# Altium PCB Control_Board_Model_C_Rigid_Flex_Flipped.PcbDoc (part 8 of 8)
Units mil, origin at the board's own origin, x right, y up, seen from the top; angles counter-clockwise.
Board outline 3417.32 x 2110.24 mil, 6 copper layers (1-Sig/GND, 2-Sig, 3-GND, 4-Sig/Pwr, 5-Sig, 6-Sig/GND), stack 39.291 mil thick; 418 components, 342 nets, 1601 pads, 44 vias.
Unrouted connection lines stored in the file: 13.
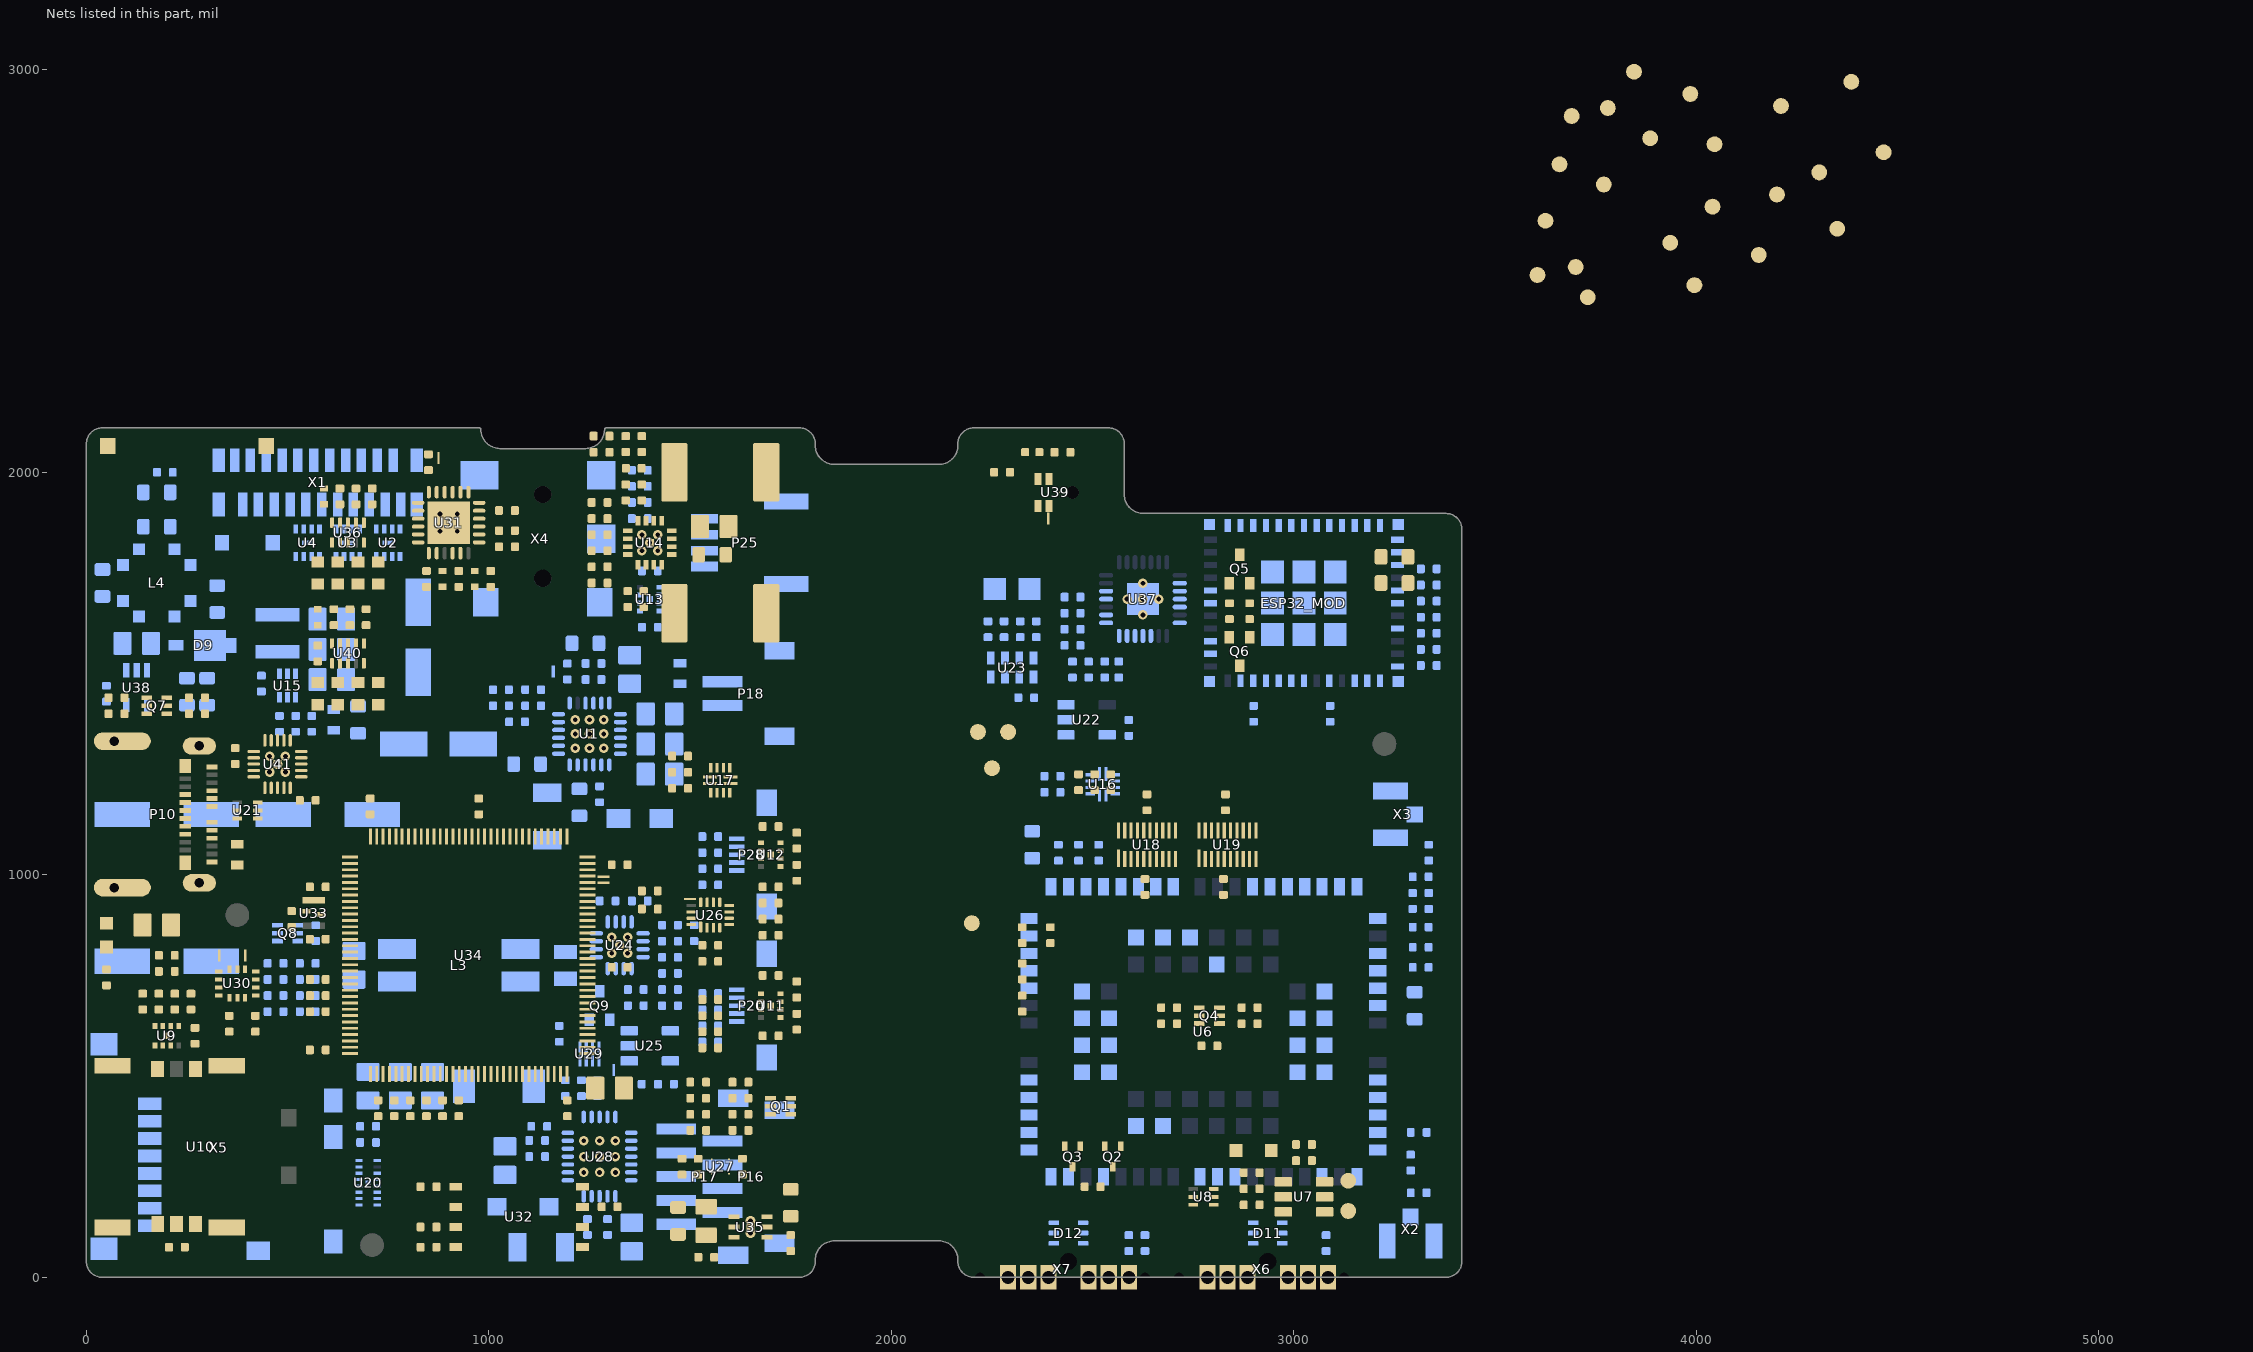
[diagram p8: the nets of this part, all layers, seen from the top]

## Part data (continued)
U28: library part "IC DRV10975Z BLDC MOTOR DRIVER VQFN-24", "Multiphase Motor Driver Power MOSFET Analog, I²C, PWM 24-VQFN (5x4)", Manufacturer="Texas Instruments", Maximum Operating Temperature="+ 125 C", Minimum Operating Temperature="- 40 C", Operating Frequency="100 kHz", Operating Supply Current="5 mA", Operating Supply Voltage="6.5 V to 18 V", Operating Temperature Range="- 40 C to + 125 C", Output Current="1.5 A", Output Voltage="19 V", Package / Case=VQFN-24, Supplier Part Number 1=296-50214-1-ND, Brand="Texas Instruments", Category="Motor / Motion / Ignition Controllers & Drivers", Development Kit=DRV10975EVM, Features="Buck Step Down Converter, Initial Position Detect (IPD), Rotor Lock Protection, SPI/I2C, Integrated", Manufacturer Part Number=DRV10975ZRHFR, Minimum Order Quantity=1, Moisture Sensitive=Yes, Mount="Surface Mount", Number of Outputs="3 Output", Packaging="Cut Tape", Pricing 1="1=2.73, 10=2.31, 100=1.85, 250=1.62, 500=1.58, 1000=1.25, 3000=1.21, 6000=1.16, 9000=1.14 (USD)", Product="Brushless DC Motor Controllers", Product Type="Motor / Motion / Ignition Controllers & Drivers", Reeling=True, RoHS="RoHS Compliant", RoHS - Mouser=Y, Series=DRV10975, Standard Pack Qty=3000, Stock 1=2979, Subcategory="PMIC - Power Management ICs", Supplier 1=Digi-Key, Type="Half Bridge"
U29: library part "IC TXS0102 TRNSLTR BIDIRECTIONAL 8X2SON", "2-Bit Bidirectional Voltage-Level Translator for Open-Drain Application", High Level Output Current=-20uA, Low Level Output Current=1mA, Manufacturer="Texas Instruments", Max Operating Temperature=85°C, Max Supply Voltage=5.5V, Min Operating Temperature=-40°C, Min Supply Voltage=1.65V, Package Quantity=1, Quiescent Current=14.4uA, Supplier Part Number 1=296-28435-1-ND, ComponentLink1Description=https://www.verical.com/server-webapp/html/getDatasheet?partID=544149&src-supplier=Verical, ComponentLink1URL=https://www.verical.com/server-webapp/html/getDatasheet?partID=544149&src-supplier=Verical, ComponentLink2Description=http://www.ti.com/general/docs/suppproductinfo.tsp?distId=10&gotoUrl=http%3A%2F%2Fwww.ti.com%2Flit%2Fgpn%2Ftxs0102&src-supplier=Digi-Key, ComponentLink2URL=http://www.ti.com/general/docs/suppproductinfo.tsp?distId=10&gotoUrl=http%3A%2F%2Fwww.ti.com%2Flit%2Fgpn%2Ftxs0102&src-supplier=Digi-Key, Contact Plating=Gold, Data Rate=24Mbps, Height=0.35mm, Lead Free="Lead Free", Length=1.85mm, Logic Function=Translator, Manufacturer Part Number=TXS0102DQMR, Mount="Surface Mount", Number of Bits=2, Number of Channels=2, Number of Inputs=2, Number of Pins=8, Output Type=Voltage, Packaging="Tape and Reel", Pricing 1="1=0.69, 10=0.611, 25=0.5736, 100=0.4681, 250=0.4348, 500=0.37, 1000=0.296 (USD)", Propagation Delay=260ns, Radiation Hardening=No, REACH SVHC="No SVHC", Stock 1=53273, Supplier 1=Digi-Key, Turn-On Delay Time=4.6ns, Width=1.25mm
U30: library part "IC BMI270 IMU ACCEL/GYRO I2C/SPI 14LGA", "Accelerometer, Gyroscope, 6 Axis Sensor I²C, SPI Output", Manufacturer="Bosch Sensortec", Supplier Part Number 1=828-1091-1-ND, Manufacturer Part Number=BMI270, Pricing 1="1=5.75, 5=5.07, 10=4.478, 25=3.6336, 50=3.211, 100=3.1265, 500=2.6195, 1000=2.4505 (USD)", Stock 1=0, Supplier 1=Digi-Key
U31: library part "IC CMX655DQ6-TR1K VOICE CODEC 16BIT 24VQFN", "Voice-Band Interface 16 b I²S, PCM, SPI 24-VQFN (4x4)", Case/Package=VQFN, Manufacturer="CML Microcircuits", Supplier Part Number 1=226-CMX655DQ6, ComponentLink1Description=https://www.cmlmicro.com/wp-content/uploads/2018/10/CMX655_ds.pdf?src-supplier=Digi-Key, ComponentLink1URL=https://www.cmlmicro.com/wp-content/uploads/2018/10/CMX655_ds.pdf?src-supplier=Digi-Key, Manufacturer Part Number=CMX655DQ6, Mount="Surface Mount", Packaging="Cut Tape", Pricing 1="1=1.41, 10=1.41, 50=1.36, 100=1.22, 1000=1.07, 10000=1.01 (USD)", Stock 1=164, Supplier 1=Mouser, Supplier 2=Digi-Key, Supplier Part Number 2=2032-1036-1-ND
U32: library part "IC MT29F1G01ABAFDWB FLASH 1GBIT SPI 8UPDFN", "FLASH - NAND Memory IC 1Gb (1G x 1) SPI   8-U-PDFN (8x6)", Manufacturer="Micron Technology", Max Operating Temperature=85°C, Min Operating Temperature=-40°C, Supplier Part Number 1=557-1654-1-ND, Interface=SPI,Serial, Manufacturer Part Number="MT29F1G01ABAFDWB-IT:F TR", Memory Type=FLASH,NAND, Number of Pins=8, Packaging="Tape and Reel", Pricing 1="1=2.68, 10=2.414, 25=2.3768, 50=2.3704, 100=2.1181, 250=2.0485, 500=2.041, 1000=1.9006 (USD)", Stock 1=2188, Supplier 1=Digi-Key
U33: "32.768kHz XO (Standard) LVCMOS Oscillator 1.5V ~ 3.63V  4-SMD, No Lead", Case/Package=SMD/SMT, Current Rating=1.35uA, Frequency=32.768kHz, Frequency Stability=100ppm, Load Capacitance=10pF, Manufacturer=SiTime, Manufacturer Part Number=SIT1533AI-H4-DCC-32.768E, Max Operating Temperature=85°C, Max Supply Current=1.4uA, Max Supply Voltage=3.63V, Min Operating Temperature=-40°C, Min Supply Voltage=1.5V, Package Quantity=1000, Supplier Part Number 1=1473-1239-1-ND, ClassName=MCU, ComponentLink1Description=https://www.sitime.com/datasheet/SiT1533?src-supplier=Digi-Key, ComponentLink1URL=https://www.sitime.com/datasheet/SiT1533?src-supplier=Digi-Key, ComponentLink2Description=http://www.mouser.com/ds/2/371/SiT1533-datasheet-275337.pdf?src-supplier=Mouser, ComponentLink2URL=http://www.mouser.com/ds/2/371/SiT1533-datasheet-275337.pdf?src-supplier=Mouser, ComponentLink3Description=http://components.arrow.com/part/dataview/0323_07137603?src-supplier=Arrow+Europe, ComponentLink3URL=http://components.arrow.com/part/dataview/0323_07137603?src-supplier=Arrow+Europe, Height=0.024inch, Length=0.079inch, Max Duty Cycle=52%, Mount="Surface Mount", Number of Pins=4, Packaging="Tape and Reel", Pricing 1="1=1.1, 10=0.975, 50=0.9116, 100=0.8056, 500=0.7632 (USD)", RoHS Compliant=Yes, Stock 1=89278, Supplier 1=Digi-Key, Termination=SMD/SMT, Width=0.047inch
U34: library part "IC STM32G473QETx MCU 32BIT 512KB FLASH 128LQFP", "ARM® Cortex®-M4 STM32G4 Microcontroller IC 32-Bit 170MHz 512KB (512K x 8) FLASH 128-LQFP (14x14)", Manufacturer=STMicroelectronics, Supplier Part Number 1=497-STM32G473QET6-ND, Manufacturer Part Number=STM32G473QET6, Pricing 1="540=7.5029 (USD)", Stock 1=0, Supplier 1=Digi-Key
U35: library part "IC TPS22810DRVT PWR SWITCH N-CHAN 1:1 6WSON", "TPS22810, 2.7-18-V, 79-mOhm On-Resistance Load Switch With Thermal Protection", Manufacturer="Texas Instruments", Max Operating Temperature=105°C, Max Output Current=3A, Min Operating Temperature=-40°C, Supplier Part Number 1=296-46947-1-ND, ComponentLink1Description=http://www.ti.com/lit/ds/symlink/tps22810.pdf?src-supplier=Digi-Key, ComponentLink1URL=http://www.ti.com/lit/ds/symlink/tps22810.pdf?src-supplier=Digi-Key, ComponentLink2Description=http://www.ti.com/general/docs/lit/getliterature.tsp?genericPartNumber=TPS22810&fileType=pdf&src-supplier=Farnell, ComponentLink2URL=http://www.ti.com/general/docs/lit/getliterature.tsp?genericPartNumber=TPS22810&fileType=pdf&src-supplier=Farnell, Fault Protection="Over Temperature", Interface=On/Off, Manufacturer Part Number=TPS22810DRVT, Mount="Surface Mount", Number of Channels=1, Number of Outputs=1, Output Configuration="High Side", Packaging="Tape and Reel", Pricing 1="1=0.66, 10=0.581, 25=0.5456, 100=0.4136 (USD)", Stock 1=5029, Supplier 1=Digi-Key
U36 U40: library part "IC TPSM82822SIL 5.5-V INPUT, 2-A STEP-DOWN MODUL", "Non-Isolated PoL Module DC DC Converter 1 Output 0.6 ~ 4V    2A 2.4V - 5.5V Input", Manufacturer="Texas Instruments", Supplier Part Number 1=296-TPSM82822SILRCT-ND, ComponentLink1Description=https://octopart.com/click/track?ai=10049&ct=datasheets&sig=01db677&at=physicalpart&sid=370&ppid=108054084&hlid=30259078&src-supplier=TI+store, ComponentLink1URL=https://octopart.com/click/track?ai=10049&ct=datasheets&sig=01db677&at=physicalpart&sid=370&ppid=108054084&hlid=30259078&src-supplier=TI+store, Manufacturer Part Number=TPSM82822SILR, Pricing 1="1=2.81, 10=2.523, 25=2.3848, 100=1.961, 250=1.7596, 500=1.696, 1000=1.4098 (USD)", Stock 1=2595, Supplier 1=Digi-Key
U37: library part "IC CP2102N USB TO UART BRIDGE QFN28", "USB Bridge, USB to UART USB 2.0 UART Interface 28-QFN (5x5)", Manufacturer="Silicon Labs", Supplier Part Number 1=336-5890-1-ND, ComponentLink1Description=https://4donline.ihs.com/images/VipMasterIC/IC/SILC/SILC-S-A0007770867/SILC-S-A0007770867-1.pdf?hkey=6D3A4C79FDBF58556ACFDE234799DDF0&src-supplier=Farnell, ComponentLink1URL=https://4donline.ihs.com/images/VipMasterIC/IC/SILC/SILC-S-A0007770867/SILC-S-A0007770867-1.pdf?hkey=6D3A4C79FDBF58556ACFDE234799DDF0&src-supplier=Farnell, Manufacturer Part Number=CP2102N-A02-GQFN28R, Mount="Surface Mount", Pricing 1="1=1.4, 25=1.3516, 100=1.2995 (USD)", Stock 1=3461, Supplier 1=Digi-Key
U38: library part "IC TPS61169 WLED BACKLIGHT DRIVER SC70-5", "LED Driver IC 1 Output DC DC Regulator Step-Up (Boost) PWM Dimming 1.8A (Switch) SC-70-5", Case/Package=SC, Frequency=1.2MHz, Manufacturer="Texas Instruments", Max Input Voltage=5.5V, Max Operating Temperature=85°C, Max Output Current=2.4A, Max Output Voltage=38V, Min Input Voltage=2.7V, Min Operating Temperature=-40°C, Nominal Input Voltage (DC)=3.6V, Output Current=400mA, Output Current per Channel=1.8A, Package Quantity=3000, Supplier Part Number 1=296-40821-1-ND, ComponentLink1Description=http://www.ti.com/general/docs/lit/getliterature.tsp?genericPartNumber=TPS61169&&fileType=pdf&src-supplier=Element14, ComponentLink1URL=http://www.ti.com/general/docs/lit/getliterature.tsp?genericPartNumber=TPS61169&&fileType=pdf&src-supplier=Element14, ComponentLink2Description=http://www.ti.com/general/docs/lit/getliterature.tsp?genericPartNumber=TPS61169&amp;&amp;fileType=pdf&src-supplier=Farnell, ComponentLink2URL=http://www.ti.com/general/docs/lit/getliterature.tsp?genericPartNumber=TPS61169&amp;&amp;fileType=pdf&src-supplier=Farnell, ComponentLink3Description=http://www.ti.com/lit/ds/symlink/tps61169.pdf?src-supplier=Digi-Key, ComponentLink3URL=http://www.ti.com/lit/ds/symlink/tps61169.pdf?src-supplier=Digi-Key, ComponentLink4Description=http://www.ti.com/general/docs/lit/getliterature.tsp?genericPartNumber=TPS61169&&fileType=pdf&src-supplier=Avnet, ComponentLink4URL=http://www.ti.com/general/docs/lit/getliterature.tsp?genericPartNumber=TPS61169&&fileType=pdf&src-supplier=Avnet, ComponentLink5Description=http://www.ti.com/lit/gpn/tps61169?src-supplier=Mouser, ComponentLink5URL=http://www.ti.com/lit/gpn/tps61169?src-supplier=Mouser, Contact Plating=Gold, Dimming=PWM, Height=1.1mm, Lead Free="Lead Free", Length=2mm, Manufacturer Part Number=TPS61169DCKR, Max Input Voltage (DC)=5.5V, Max Supply Voltage=5.5V, Min Output Voltage=2.7V, Mount="Surface Mount", Number of Channels=1, Number of Outputs=1, Number of Pins=5, Output Type=Frequency, Output Voltage=38V, Packaging="Tape and Reel", Pricing 1="1=0.9, 10=0.805, 25=0.7644, 100=0.587, 250=0.5187, 500=0.4914, 1000=0.3822 (USD)", REACH SVHC="No SVHC", Stock 1=112915, Supplier 1=Digi-Key, Switching Frequency=1.2MHz, Topology=Boost, Weight=0.000705oz, Width=1.25mm
U39: library part "IC IM69D130 MICROPHONE MEMS DIGITAL PDM OMNI", "20Hz ~ 20kHz Digital, PDM Microphone MEMS (Silicon) 1.62V ~ 3.6V Omnidirectional (-36dB ±1dB @ 94dB SPL) Solder Pads", Manufacturer=Infineon, Max Frequency=3.3MHz, Operating Supply Current=1.3mA, Operating Supply Voltage=-3.6V, Supplier Part Number 1=IM69D130V01XTSA1CT-ND, ComponentLink1Description=http://www.farnell.com/datasheets/2718732.pdf?src-supplier=Newark, ComponentLink1URL=http://www.farnell.com/datasheets/2718732.pdf?src-supplier=Newark, ComponentLink2Description=https://www.infineon.com/dgdl/Infineon-IM69D130-DS-v01_00-EN.pdf?fileId=5546d462602a9dc801607a0e46511a2e&src-supplier=Digi-Key, ComponentLink2URL=https://www.infineon.com/dgdl/Infineon-IM69D130-DS-v01_00-EN.pdf?fileId=5546d462602a9dc801607a0e46511a2e&src-supplier=Digi-Key, ComponentLink3Description=http://www.farnell.com/datasheets/2718732.pdf?src-supplier=Farnell, ComponentLink3URL=http://www.farnell.com/datasheets/2718732.pdf?src-supplier=Farnell, Direction=Omnidirectional, Halogen Free="Halogen Free", Lead Free="Lead Free", Manufacturer Part Number=IM69D130V01XTSA1, Output Type=Digital, Packaging="Cut Tape", Pricing 1="1=1.76, 10=1.458, 25=1.3476, 50=1.2674, 100=1.19, 500=1.0214 (USD)", RoHS Compliant=Yes, Shape=Rectangular, Stock 1=16861, Supplier 1=Digi-Key, Termination=Solder
U41: library part "IC TPD6S300A USB-C ESD PROTECTION", "USB Type-C™ Port Protector: Short-to-VBUS Overvoltage  and IEC ESD Protection", Manufacturer="Texas Instruments", Maximum Operating Temperature="+ 85 C", Minimum Operating Temperature="- 40 C", Operating Supply Current="600 mA", Operating Supply Voltage="3.3 V", Package / Case=WQFN-20, Supplier Part Number 1=595-TPD6S300ARUKR, Supply Voltage - Max="3.6 V", Supply Voltage - Min="2.7 V", Brand="Texas Instruments", Category="USB Interface IC", Data Rate=-, ESD Protection="ESD Protection", Interface Type=USB, Manufacturer Part Number=TPD6S300ARUKR, Minimum Order Quantity=1, Moisture Sensitive=Yes, Mount="Surface Mount", Mounting Style=SMD/SMT, Packaging="Cut Tape", Pricing 1="1=1.31, 10=1.11, 100=0.852, 500=0.753, 1000=0.594, 3000=0.555, 6000=0.527, 9000=0.507 (USD)", Product="USB Protectors", Product Type="USB Interface IC", Reeling=True, RoHS="RoHS Compliant", RoHS - Mouser=Y, Series=TPD6S300A, Speed="Super Speed", Standard="USB-C 2.0", Standard Pack Qty=3000, Stock 1=6078, Subcategory="Interface ICs", Supplier 1=Mouser, Supplier 2=Digi-Key, Supplier Part Number 2=296-51856-1-ND
X1: library part "CONN 0525592253 FFC VERT 22POS 0.50MM SMD", "22 Position FFC, FPC Connector Contacts, Vertical - 1 Sided 0.020\" (0.50mm) Surface Mount", Current Rating=500mA, Manufacturer=Molex, Manufacturer Part Number=52559-2253, Package Quantity=1000, Supplier Part Number 1=WM10988CT-ND, Voltage Rating=50V, ComponentLink1Description=http://www.farnell.com/datasheets/1896633.pdf?src-supplier=Element14, ComponentLink1URL=http://www.farnell.com/datasheets/1896633.pdf?src-supplier=Element14, ComponentLink2Description=http://www.mouser.com/ds/2/276/0525592253_FFC_FPC_CONNECTORS-229826.pdf?src-supplier=Mouser, ComponentLink2URL=http://www.mouser.com/ds/2/276/0525592253_FFC_FPC_CONNECTORS-229826.pdf?src-supplier=Mouser, Contact Material=Bronze, Contact Plating=Gold, Gender=Receptacle, Housing Material=Nylon, Mount="Surface Mount", Number of Circuits=22, Number of Contacts=22, Number of Positions=22, Number of Rows=1, Orientation=Vertical, Packaging="Tape and Reel", pin_1=ROW_1, pin_2=ROW_2, pin_3=ROW_3, pin_4=COL_1, pin_5=COL_2, pin_6=COL_3, pin_7=PWR, pin_8=GND, pin_9=RESET, pin_10=GND, pin_11=SDA, pin_12=GND, pin_13=RS, pin_14=GND, pin_15=WR, pin_16=GND, pin_17=CS, pin_18=GND, pin_19=LED_K, pin_20=GND, pin_21=LED_A, pin_22=VDD, pin_23=MNT, pin_24=MNT, Pitch=0.5mm, Pricing 1="1=2.66, 10=2.267, 100=1.8728 (USD)", REACH SVHC=Unknown, Series=52559, Stock 1=4369, Supplier 1=Digi-Key, Termination=SMD/SMT
X2 X3: library part "CONN U.FL RCPT STR 50 OHM SMD", "U.FL (UMCC) Connector Receptacle, Male Pin 50Ohm Surface Mount Solder", Dielectric Material=Polymer, Frequency=6GHz, Housing Color=Beige, Insulation Resistance=500MR, Manufacturer=Hirose, Max Operating Temperature=90°C, Min Operating Temperature=-40°C, Package Quantity=2500, Supplier Part Number 1=H11891CT-ND, Body Material=Bronze, Body Plating=Silver, ClassName=P109, ComponentLink1Description=http://www.farnell.com/datasheets/91524.pdf?src-supplier=Element14, ComponentLink1URL=http://www.farnell.com/datasheets/91524.pdf?src-supplier=Element14, ComponentLink2Description=http://uk.rs-online.com/webdocs/1363/0900766b81363563.pdf?src-supplier=RSComponents, ComponentLink2URL=http://uk.rs-online.com/webdocs/1363/0900766b81363563.pdf?src-supplier=RSComponents, ComponentLink3Description=http://www.farnell.com/datasheets/2691132.pdf?src-supplier=Element14, ComponentLink3URL=http://www.farnell.com/datasheets/2691132.pdf?src-supplier=Element14, Connector Type="Coaxial,Receptacle,Male Pin", Contact Material=Brass,Bronze, Contact Plating=Gold, Depth=3.1mm, Fastening Type=Snap, Gender=Male, Impedance=50R, Lead Free="Lead Free", Length=3mm, Manufacturer Part Number=U.FL-R-SMT-1(10), Max Frequency=6GHz, Mount="Surface Mount", Orientation=Straight, Packaging="Tape and Reel", Pricing 1="1=1.31, 10=1.15, 25=1.0824, 50=1.0374, 100=0.9922, 250=0.902, 500=0.8118, 1000=0.7216 (USD)", Radiation Hardening=No, REACH SVHC="No SVHC", Stock 1=19543, Supplier 1=Digi-Key, Termination=Solder, Wire/Cable Type=Coaxial
X4: library part "AUDIO JACK SJ2-25515A 2.5 MM RT 5 CONDUC", "2.50mm (0.094\", 3/32\", Sub Mini, Miniature) - Headphone Phone Jack 5 Conductor (TRRRS) Connector Solder", Color=Black, Current Rating=1A, Manufacturer=CUI, Manufacturer Part Number=SJ2-25515A-SMT-TR, Max Operating Temperature=85°C, Min Operating Temperature=-25°C, Supplier Part Number 1=CP-SJ2-25515A-SMT-CT-ND, ComponentLink1Description=https://www.cui.com/product/resource/digikeypdf/sj2-2551x-smt.pdf?src-supplier=Digi-Key, ComponentLink1URL=https://www.cui.com/product/resource/digikeypdf/sj2-2551x-smt.pdf?src-supplier=Digi-Key, Connector Type=Jack, Contact Material=Brass, Contact Plating=Gold,Silver, Gender=Female, Housing Material=Nylon, Mount="Surface Mount", Number of Conductors=5, Number of Ports=1, Orientation=Horizontal, Packaging="Cut Tape", pin_1=GND, pin_2=SCL, pin_3=SDA, pin_4=VDD, pin_5=GPIO, Pricing 1="1=1.35, 10=1.227, 25=1.1524, 50=1.1022, 100=1.0521, 250=0.9519, 500=0.8768 (USD)", Shielding=Unshielded, Stock 1=946, Supplier 1=Digi-Key, Termination=Solder
X5: library part "CONN MICRO SD CARD PUSH-PUSH R/A", "10 (8 + 2) Position Card Connector Secure Digital - microSD™ Surface Mount, Right Angle Gold", Current Rating=500mA, Manufacturer=Molex, Manufacturer Part Number=5025700893, Max Operating Temperature=85°C, Max Voltage Rating (DC)=1.01kV, Min Operating Temperature=-25°C, Package Quantity=1, Supplier Part Number 1=WM19093CT-ND, Voltage Rating (AC)=10V, ComponentLink1Description=https://www.molex.com/pdm_docs/sd/5025700893_sd.pdf?src-supplier=Digi-Key, ComponentLink1URL=https://www.molex.com/pdm_docs/sd/5025700893_sd.pdf?src-supplier=Digi-Key, ComponentLink2Description=http://www.mouser.com/ds/2/276/5025700893_MEMORY_CARD_SOCKET-179363.pdf?src-supplier=Mouser, ComponentLink2URL=http://www.mouser.com/ds/2/276/5025700893_MEMORY_CARD_SOCKET-179363.pdf?src-supplier=Mouser, ComponentLink3Description=http://www.molex.com/webdocs/datasheets/pdf/en-us/5025700893_MEMORY_CARD_SOCKET.pdf?src-supplier=Avnet+Europe, ComponentLink3URL=http://www.molex.com/webdocs/datasheets/pdf/en-us/5025700893_MEMORY_CARD_SOCKET.pdf?src-supplier=Avnet+Europe, ComponentLink4Description=http://www.farnell.com/datasheets/1630840.pdf?src-supplier=Element14, ComponentLink4URL=http://www.farnell.com/datasheets/1630840.pdf?src-supplier=Element14, ComponentLink5Description=http://uk.rs-online.com/webdocs/13c5/0900766b813c54fb.pdf?src-supplier=RSComponents, ComponentLink5URL=http://uk.rs-online.com/webdocs/13c5/0900766b813c54fb.pdf?src-supplier=RSComponents, ComponentLink6Description=https://www.verical.com/server-webapp/html/getDatasheet?partID=321553&src-supplier=Verical, ComponentLink6URL=https://www.verical.com/server-webapp/html/getDatasheet?partID=321553&src-supplier=Verical, ComponentLink7Description=http://www.molex.com/webdocs/datasheets/pdf/en-us/5025700893_MEMORY_CARD_SOCKET.pdf?src-supplier=Avnet+Asia, ComponentLink7URL=http://www.molex.com/webdocs/datasheets/pdf/en-us/5025700893_MEMORY_CARD_SOCKET.pdf?src-supplier=Avnet+Asia, ComponentLink8Description=http://www.molex.com/webdocs/datasheets/pdf/en-us/5025700893_MEMORY_CARD_SOCKET.pdf?src-supplier=Avnet, ComponentLink8URL=http://www.molex.com/webdocs/datasheets/pdf/en-us/5025700893_MEMORY_CARD_SOCKET.pdf?src-supplier=Avnet, ComponentLink9Description=http://www.molex.com/webdocs/datasheets/pdf/en-us/5025700893_MEMORY_CARD_SOCKET.pdf?src-supplier=Element14, ComponentLink9URL=http://www.molex.com/webdocs/datasheets/pdf/en-us/5025700893_MEMORY_CARD_SOCKET.pdf?src-supplier=Element14, Connector Type=Connector, Contact Material="Copper Alloy,Copper", Contact Plating=Gold, Depth=15.5mm, Gender=Female, Halogen Free="Low Halogen", Height=1.8mm, Housing Material=Polymer, Lead Free="Lead Free", Length=13.8mm, Mount="Surface Mount", Number of Circuits=8, Number of Contacts=8, Number of Rows=1, Orientation="Right Angle", Packaging="Tape and Reel", pin_0=SHELL, pin_1=DAT2, pin_2=CD/DAT3, pin_3=CMD, pin_4=Vdd, pin_5=CLK, pin_6=Vss, pin_7=DAT0, pin_8=DAT1, pin_9=DET_LVR, pin_10=DET_SW, Pitch=1.1mm, Pricing 1="1=3.97, 10=3.812, 25=3.4944, 50=3.3356, 100=3.1768, 250=2.7797, 500=2.7003 (USD)", Radiation Hardening=No, REACH SVHC=Unknown, Stock 1=10664, Supplier 1=Digi-Key, Termination=SMD/SMT, Width=1.8mm
X6 X7: library part "EC06-IDC 6-pin Castellated Board-Edge Connector", "6-pin Edge-Connect™ connector to 6-pin 0.1\" pitch female IDC.", pin_1=1, pin_2=2, pin_3=3, pin_4=4, pin_5=5, pin_6=6
Y1: library part "SPEAKER CMS-151135-078S 15 X 11 MM ENCLOSED", "8 Ohms General Purpose Speaker 700mW 100Hz ~ 20kHz Top Rectangular", Manufacturer=CUI, Max Power Dissipation=1W, Power Rating=700mW, Self Resonant Frequency=550Hz, Supplier Part Number 1=102-4616-ND, ComponentLink1Description=https://www.cui.com/product/resource/digikeypdf/CMS-15113-078x.pdf?src-supplier=Digi-Key, ComponentLink1URL=https://www.cui.com/product/resource/digikeypdf/CMS-15113-078x.pdf?src-supplier=Digi-Key, Impedance=8R, Manufacturer Part Number=CMS-151135-078S, Packaging=Tray, Pricing 1="1=2.07, 10=1.72, 25=1.5888, 50=1.4932, 100=1.4013, 500=1.2016, 1000=1.17 (USD)", Sensing Method=Magnetic, Shape=Rectangular, Stock 1=1971, Supplier 1=Digi-Key, Type="General Purpose"
Logo: ClassName=PCB_FEATURE

## Via types
v1: diameter 23.81, hole 11.81, 1-Sig/GND to 6-Sig/GND, tented both sides, 31 vias
v2: diameter 23.82, hole 11.81, 1-Sig/GND to 6-Sig/GND, tented both sides, 9 vias
v3: diameter 23.62, hole 11.81, 1-Sig/GND to 6-Sig/GND, tented both sides, 4 vias

## Nets (pads, with @x,y where several pads share a name; then routed paths per layer and width w, separated by ;. In a path a pad name is that pad's centre, name@x,y a point inside that pad or via, vN(x,y) a via of type N, cw(c..) or ccw(c..) an arc to the next point about the centre after c; other vN are vias at no path point)
+1V8: C33.2 C84.2 Q4.3 Q4.6 R61.2 R62.2 R63.2 TP14.1 U27.1
+1V8_BG95: C17.2 C18.2 C55.2 C57.2 R45.1 U6.29 U18.5 U19.5
+3V3: C12.1 C13.1 C34.1 C35.1 C36.1 C53.2 C54.2 C56.1 C58.1 C59.2 C60.2 C81.1 C82.1 C91.1 C93.2 C94.1 C95.2 C101.2 C102.2 C103.2 C104.2 C105.2 C106.2 C107.1 C108.2 C109.1 C110.2 C111.1 C112.2 C113.1 C114.1 C115.1 C121.1 C130.2 C131.2 C132.2 C133.2 C142.2 C143.1 C144.1 C145.2 C146.2 C147.2 ESP32_MOD.3 FB5.2 FB7.1 J1.1 NT4.1 NT7.2 Q1.2 Q1.5 R9.2 R10.2 R11.1 R12.1 R13.1 R14.1 R15.1 R16.1 R17.1 R18.1 R24.1 R25.1 R54.1 R55.1 R56.1 R67.2 R82.1 R85.1 R115.2 R116.2 R118.1 R119.1 R120.1 R121.1 R130.1 R134.2 TP15.1 U11.5 U12.5 U13.5 U16.12 U17.12 U18.16 U19.16 U20.15 U20.16 U26.1 U29.1 U30.5 U30.8 U31.7 U31.8 U32.8 U33.4 U34.6 U34.13 U34.31 U34.47 U34.64 U34.79 U34.95 U34.111 U34.128 U35.6 U37.6 U37.7 U40.5 U40.6 U40.7 U41.10 X1.22 X5.4 X6.1 X7.1
+3V3_AUX: C37.2 C38.2 C39.2 C67.2 C69.2 C83.2 C123.1 P20.3 P28.3 R5.2 R6.2 R7.2 R8.2 R19.1 R20.1 R21.1 R97.1 R112.2 R124.2 TP13.1 U22.5 U23.7 U27.4 U35.1 X4.4
\BG95_PWRKEY: C32.2 Q2.3 U6.15
\BG95_RESET: Q3.3 U6.17
\CP2102_RST: R130.2 U37.9
\ESP32_RST: C100.2 ESP32_MOD.8 R117.1 R118.2
\INT: R97.2 U23.2
\RST: Q5.3 R51.2 R117.2
\STM32_RST: D11.6 R18.2 R122.1 X6.3
\SUSP_B: U37.11
\UI_BAT_EN: D3.1 U1.12 U3.7
A1_0: U6.19 U19.1
A1_1: U6.20 U19.2
A1_2: U6.21 U19.3
A1_3: U6.18 U19.4
A1_4: U6.30 U19.7
A1_5: U6.39 U19.8
A1_6: U6.38 U19.9
A1_7: U6.1 U19.10
A2_0: U6.35 U18.1
A2_1: U6.34 U18.2
A2_2: U6.27 U18.3
A2_3: U6.28 U18.4
A2_4: U6.23 U18.7
A2_5: U6.22 U18.8
A2_6: U6.36 U18.9
A2_7: U6.37 U18.10
B1_0: U19.20 U34.16
B1_1: U19.19 U34.50
B1_2: U19.18 U34.49
B1_3: U19.17 U34.14
B1_4: U19.14 U34.17
B1_5: U19.13 U34.9
B1_6: U19.12 U34.18
B1_7: U19.11 U34.48
B2_0: U16.3 U18.20
B2_1: U16.4 U18.19
B2_2: U16.5 U18.18
B2_3: U16.6 U18.17
B2_4: U16.7 U18.14
B2_5: U16.8 U18.13
B2_6: U18.12 U34.73
B2_7: U18.11 U34.68
BG95_PON_TRIG: Q4.4 R49.1 U6.96
BG95_USB_BOOT: Q4.1 R47.1 U6.75
BG95_USB_D_N: R37.1 U6.10 U8.2
BG95_USB_D_P: R36.1 U6.9 U8.1
BG95_USB_VBUS: R35.1 U6.8
BLDC_TS: P17.4
CLK: U9.2 U10.S3
CLKOUT: U23.1
COL_1: U2.1 X1.4
COL_2: U3.4 X1.5
COL_3: U3.3 X1.6
CONN_CC1: P10.A5 U41.4 U41.7
CONN_CC2: P10.B5 U41.5 U41.6
CONN_D_N: P10.A7 P10.B7 U21.5
CONN_D_P: P10.A6 P10.B6 U21.6
CONN_SBU1: P10.A8 U41.1
CONN_SBU2: P10.B8 U41.2
CTRL: R26.2 U28.10
D1_USB_MUX_N: NT3.2 U17.4
D1_USB_MUX_P: NT2.2 U17.3
D2_USB_MUX_N: U8.5 U17.6
D2_USB_MUX_P: U8.6 U17.5
D3_USB_MUX_N: U17.8 U37.5
D3_USB_MUX_P: U17.7 U37.4
D_N: U17.10 U21.2
D_P: U17.11 U21.1
DEBUG.CTS/TMS: D12.5 X7.2
DEBUG.RTS/TDO: D12.3 X7.6
DIO: U9.3 U10.S6
DISP_D/C: U4.2 X1.15
DISP_DATA: U4.4 X1.11
DISP_NCS: U4.1 X1.17
DISP_RST: U3.1 X1.9
DISP_SCK: U4.3 X1.13
DRV10975_TP.SCL: R107.2 TP4.1 U28.7 U29.7
DRV10975_TP.SDA: R108.2 TP5.1 U28.8 U29.6
DRV10975_TP.V1P8: C87.2 TP1.1 U28.4
DRV10975_TP.V3P3: C86.2 C92.2 R107.1 R108.1 R109.1 TP3.1 U28.6 U29.8
DRV10975_TP.VREG: C90.1 D8.1 R110.2 TP2.1 U28.3
EVI: R99.2 U23.8
FG: R27.2 R109.2 U28.9
GND: C1.1 C3.1 C4.1 C5.1 C6.1 C7.1 C8.1 C9.2 C10.2 C11.2 C12.2 C13.2 C14.2 C15.2 C16.2 C17.1 C18.1 C19.2 C20.1 C21.2 C22.1 C23.2 C24.1 C25.2 C26.2 C27.1 C28.1 C29.1 C30.1 C32.1 C33.1 C34.2 C35.2 C36.2 C37.1 C38.1 C39.1 C40.1 C41.1 C42.1 C43.1 C44.1 C45.1 C46.1 C47.2 C48.2 C49.2 C50.2 C51.1 C52.1 C53.1 C54.1 C55.1 C56.2 C57.1 C58.2 C59.1 C60.1 C61.1 C62.2 C63.1 C64.1 C65.1 C66.1 C67.1 C68.1 C69.1 C70.2 C71.1 C72.1 C73.1 C74.1 C75.1 C76.1 C78.1 C79.1 C80.1 C81.2 C82.2 C83.1 C84.1 C86.1 C87.1 C89.2 C90.2 C91.2 C92.1 C93.1 C94.2 C95.1 C96.1 C97.1 C98.1 C99.1 C100.1 C101.1 C102.1 C103.1 C104.1 C105.1 C106.1 C107.2 C108.1 C109.2 C110.1 C111.2 C112.1 C113.2 C114.2 C115.2 C116.1 C117.1 C118.1 C119.1 C120.2 C121.2 C122.2 C123.2 C124.2 C125.2 C127.2 C128.2 C129.1 C130.1 C131.1 C132.1 C133.1 C134.1 C135.2 C137.1 C138.2 C139.1 C140.2 C141.2 C143.2 C144.2 C145.1 C146.1 C147.1 C148.1 D2.2 D4.2 D5.2 D6.2 D8.2 D11.2 D11.4 D12.2 D12.4 ESP32_MOD.1 ESP32_MOD.2 ESP32_MOD.11 ESP32_MOD.14 ESP32_MOD.36 ESP32_MOD.37 ESP32_MOD.38 ESP32_MOD.39 ESP32_MOD.40 ESP32_MOD.41 ESP32_MOD.42 ESP32_MOD.43 ESP32_MOD.44 ESP32_MOD.45 ESP32_MOD.46 ESP32_MOD.47 ESP32_MOD.48 ESP32_MOD.49 ESP32_MOD.50 ESP32_MOD.51 ESP32_MOD.52 ESP32_MOD.53 L3.4 L4.1 NT1.2 NT5.1 NT6.1 NT8.2 P10.A1 P10.A12 P10.B1 P10.B12 P10.S1 P10.S2 P10.S3 P10.S4 P16.1 P16.S1 P16.S2 P17.5 P17.S1 P17.S2 P18.2 P18.S1 P18.S2 P19.2 P20.0 P20.5 P25.S1 P25.S2 P28.0 P28.5 Q2.2 Q3.2 Q7.1 Q7.4 Q8.1 R2.2 R3.1 R33.2 R34.2 R46.1 R47.2 R48.1 R49.2 R50.1 R57.1 R68.1 R70.1 R71.1 R72.1 R73.1 R74.1 R75.1 R76.1 R77.1 R78.1 R80.1 R81.1 R83.2 R86.2 R87.2 R88.2 R92.1 R93.1 R94.1 R96.1 R100.1 R102.2 R103.2 R104.1 R114.2 R123.2 R125.2 R127.2 R129.2 R131.1 R133.2 R135.2 TP19.1 TP20.1 TP21.1 TP22.1 TP23.1 TP24.1 TP25.1 U1.17 U1.18 U1.25 U2.GP U3.GP U4.GP U6.3 U6.31 U6.47 U6.48 U6.50 U6.54 U6.55 U6.58 U6.59 U6.61 U6.62 U6.67 U6.68 U6.69 U6.70 U6.71 U6.72 U6.73 U6.74 U6.79 U6.80 U6.81 U6.82 U6.89 U6.90 U6.91 U6.100 U6.101 U6.102 U7.2 U8.3 U9.9 U10.G1 U10.G2 U10.G3 U10.G4 U10.S4 U11.9 U12.9 U13.9 U14.7 U14.17 U15.4 U16.9 U17.9 U18.15 U19.15 U20.17 U21.3 U22.2 U23.5 U24.5 U24.6 U24.10 U24.11 U24.12 U24.13 U24.14 U24.17 U25.2 U26.9 U26.14 U27.2 U27.5 U28.2 U28.5 U28.12 U28.13 U28.25 U29.4 U30.6 U30.7 U31.24 U31.25 U32.4 U33.2 U34.12 U34.30 U34.42 U34.46 U34.63 U34.78 U34.94 U34.110 U34.127 U35.4 U35.7 U36.9 U36.10 U37.3 U37.29 U38.2 U39.5 U40.9 U40.10 U41.8 U41.13 U41.16 U41.17 U41.18 U41.21 X1.8 X1.10 X1.12 X1.14 X1.16 X1.18 X1.20 X1.S1 X1.S2 X2.1 X2.3 X3.1 X3.3 X4.1 X5.0 X5.6 X5.10 X6.5 X7.5
  other v1: 1650,109.26 1650,140.75 1235.63,260.63 1275,260.63 1314.37,260.63 1235.63,300 1275,300 1314.37,300 1235.63,339.37 1275,339.37 1314.37,339.37 1305.31,805.32 1344.69,805.32 1325,825 1305.31,844.69 1344.69,844.69 455.31,1255.32 494.69,1255.32 475,1275 455.31,1294.69 494.69,1294.69 2625,1645.63 2585.63,1685 2625,1685 2664.37,1685 2625,1724.37 1380.31,1805.32 1419.69,1805.32 1400,1825 1380.31,1844.69 1419.69,1844.69
  other v2: 1214.57,1314.57 1250,1314.57 1285.43,1314.57 1214.57,1350 1250,1350 1285.43,1350 1214.57,1385.43 1250,1385.43 1285.43,1385.43
  other v3: 878.35,1853.35 921.65,1853.35 878.35,1896.65 921.65,1896.65
GPIO0: ESP32_MOD.12 U34.114
GPIO1: ESP32_MOD.13 U34.113
GPIO2: ESP32_MOD.5 R54.2 U34.115
GPIO3: ESP32_MOD.6 R55.2 U34.116
GPIO4: ESP32_MOD.18
GPIO5: ESP32_MOD.19
GPIO6: ESP32_MOD.20
GPIO7: ESP32_MOD.21
GPIO8: ESP32_MOD.22 R56.2
GPIO9: ESP32_MOD.23 Q6.3
GPIO10: ESP32_MOD.16 R57.2
GPIO18: ESP32_MOD.26
GPIO19: ESP32_MOD.27
GPIO20: ESP32_MOD.30 U37.26
GPIO21: ESP32_MOD.31 U37.25
LCD_BL_A: C137.2 C138.1 D9.1 D10.1 X1.21
LCD_BL_K: D10.2 R131.2 U38.3 X1.19
MICCLK: R113.2 U31.10
MICDO: R132.1 U31.11
MICRO_SD.DAT1: U20.8
MICRO_SD.DAT2: U20.3
NetC2_1: C2.1 U1.21
NetC2_2: C2.2 L1.1 U1.19 U1.20
NetC4_2: C4.2 U1.23
NetC19_1: C19.1 C21.1 C23.1 FB2.1 U6.52 U6.53
NetC20_2: C20.2 C22.2 C24.2 FB3.1 U6.32 U6.33
NetC25_1: C25.1 C26.1 C51.2 C52.2 D5.1 FB1.1 FB2.2 FB3.2 R79.2 U15.6
NetC27_2: C27.2 R43.1 U6.60
NetC28_2: C28.2 R44.1 U6.49
NetC29_2: C29.2 R43.2 X2.2
NetC30_2: C30.2 C31.1 R44.2
NetC31_2: C31.2 X3.2
NetC46_2: C46.2 R69.1
NetC68_2: C68.2 R98.1 U23.6
NetC70_1: C70.1 R98.2 R99.1 TP28.1
NetC71_2: C71.2 U24.4
NetC72_2: C72.2 R101.1
NetC75_2: C75.2 R101.2 U24.7
NetC76_2: C76.2 FB4.2 U25.5
NetC77_1: C77.1 L3.1 U24.1 U24.15 U24.16
NetC77_2: C77.2 D7.2 L3.2
NetC85_1: C85.1 U28.23
NetC85_2: C85.2 U28.24
NetC88_1: C88.1 U28.22
NetC96_2: C96.2 R114.1 U31.5
NetC97_2: C97.2 C99.2 U31.4
NetC116_2: C116.2 C117.2 C118.2 C119.2 FB5.1 U34.43 U34.44 U34.45
NetC122_1: C122.1 U35.3
NetC126_1: C126.1 R126.1 R127.1 U36.8
NetC129_2: C129.2 R128.1 R129.1 U37.8
NetC134_2: C134.2 C135.1 FB6.2 L4.4 U38.5
NetC136_1: C136.1 L4.3 U38.1
NetC136_2: C136.2 D9.2 L4.2
NetC139_2: C139.2 FB7.2 U39.2
NetC142_1: C142.1 R134.1 R135.1 U40.8
NetC148_2: C148.2 U41.3
NetD1_2: D1.2 R1.1
NetD4_1: D4.1 R35.2 R38.2
NetJ1_2: J1.2 U29.5
NetL2_2: L2.2 U15.5
NetNT1_1: NT1.1 U1.10
NetNT4_2: NT4.2 U26.12
NetNT5_2: NT5.2 U39.4
NetNT6_2: NT6.2 U31.17 U31.21 U31.22
NetNT7_1: NT7.1 U30.12
NetNT8_1: NT8.1 U30.1
NetP16_3: P16.3 Q1.3 R30.2
NetP16_4: P16.4 Q1.6 R29.2
NetP17_1: P17.1 U28.14 U28.15
NetP17_2: P17.2 U28.16 U28.17
NetP17_3: P17.3 U28.18 U28.19
NetQ5_1: Q5.1 R52.2
NetQ6_1: Q6.1 R53.2
NetQ8_3: Q8.3 R95.1
NetQ8_5: Q8.5 Q8.6 R91.1
NetQ9_1: Q9.1 U25.1
NetQ9_2: Q9.2 R104.2 U25.4
NetQ9_3: Q9.3 R105.1 R106.1
NetR28_2: R28.2 R29.1 R30.1 R31.1
NetR32_2: R32.2 U4.5
NetR36_2: R36.2 U7.1
NetR37_2: R37.2 U7.3
NetR39_1: R39.1 R40.1 U6.45
NetR41_1: R41.1 U6.46
NetR42_1: R42.1 U6.44
NetR45_2: R45.2 R46.2 U18.6 U19.6
NetR51_1: R51.1
NetR58_2: R58.2 U11.6
NetR59_2: R59.2 U12.6
NetR60_2: R60.2 U13.6
NetR69_2: R69.2 R70.2 U14.12
NetR75_2: R75.2 U14.9
NetR76_2: R76.2 U14.4
NetR78_2: R78.2 R79.1 U15.1
NetR100_2: R100.2 U24.9
NetR103_1: R103.1 R105.2 U24.8
NetR110_1: R110.1 U28.1
NetR111_1: R111.1 R133.1 U40.3
NetR112_1: R112.1 U27.3
NetR113_1: R113.1 U39.3
NetR124_1: R124.1 U35.2
NetR132_2: R132.2 U39.1
NetTP26_1: TP26.1 U7.6
NetTP27_1: TP27.1 U7.4
NetU20_9: U20.9 X5.8
NetU20_10: U20.10 X5.7
NetU20_11: U20.11 X5.5
NetU20_12: U20.12 X5.3
NetU20_13: U20.13 X5.2
NetU20_14: U20.14 X5.1
NetU26_2: U26.2
NetU26_3: U26.3
NetU30_2: U30.2
NetU30_3: U30.3
NetU30_9: U30.9
NetU30_10: U30.10
NetU30_11: U30.11
NetU31_1: U31.1 Y1.M
NetU31_23: U31.23 Y1.P
NetU41_19: U41.19
NetU41_20: U41.20
OUTA1: P25.4 U14.3
OUTA2: P25.3 U14.5
OUTB1: P25.1 U14.10
OUTB2: P25.2 U14.8
P20_GPIO: C40.2 P20.4 R61.1 U11.3
P20_SCL: P20.1 U11.2
P20_SDA: P20.2 U11.1
P28_GPIO: C41.2 P28.4 R62.1 U12.3
P28_SCL: P28.1 U12.2
P28_SDA: P28.2 U12.1
PA0: Q1.4 R25.2 R27.1 U34.27
PA1: Q1.1 R24.2 R26.1 U34.28
PA2: R116.1 U31.18 U34.29
PA3: U2.8 U34.32
PA4: R102.1 U25.3 U34.33
PA5: Q7.2 R80.2 U34.34
PA6: U2.7 U34.35
PA7: Q7.5 R81.2 U34.36
PA8: U2.6 U34.89
PA9: R22.2 U34.90
PA10: R23.2 U34.91
PA11: NT3.1 U34.92
PA12: NT2.1 U34.93
PA13: D11.5 U34.96 X6.2
PA14: D11.1 U34.98 X6.4
PA15: U20.4 U34.99
PB0: R87.1 U17.1 U34.39
PB1: R88.1 U17.2 U34.40
PB2: U34.41
PB3: U26.4 U34.118
PB4: C63.2 Q7.3 R23.1 U34.119 U41.11
PB5: U34.120 U41.9
PB6: C61.2 Q7.6 R22.1 U34.121 U41.12
PB7: R5.1 TP9.1 U11.8 U22.3 U34.122
PB8: R6.1 TP8.1 U11.7 U22.1 U34.123
PB9: R72.2 U14.2 U34.124
PB10: U34.62
PB11: U34.65
PB12: R11.2 U4.8 U34.66
PB13: U4.6 U34.67
PB15: R12.2 R32.1 U34.69
PC0: C66.2 R95.2 R96.2 U34.22
PC1: C64.2 R89.2 R92.2 U34.23
PC2: C65.2 R90.2 R93.2 U34.24
PC3: U2.5 U34.25
PC4: D12.6 R17.2 U26.8 U34.37 X7.3
PC5: D12.1 R16.2 U26.7 U34.38 X7.4
PC6: D3.2 U34.80
PC7: U3.6 U34.81
PC8: R9.1 TP6.1 U1.5 U26.5 U26.16 U29.2 U30.13 U31.19 U34.87
PC9: R10.1 TP7.1 U1.6 U26.6 U26.15 U29.3 U30.14 U31.20 U34.88
PC10: U20.6 U34.100
PC11: U20.7 U34.101
PC12: U20.5 U34.102
PC13: U3.5 U34.7
PC14: U33.3 U34.8
PD0: R19.2 R58.1 U34.108
PD1: R20.2 R59.1 U34.109
PD2: R21.2 R60.1 U34.112
PD7: U30.4 U34.117
PD8: R15.2 U16.10 U34.70
PD9: R14.2 U16.11 U34.71
PD10: U24.3 U34.72
PD12: U34.74 U38.4
PD13: R64.2 U34.75
PD14: U28.11 U34.76
PD15: R65.2 U34.77
PE0: R74.2 U14.15 U34.125
PE1: R71.2 U14.1 U34.126
PE2: U31.12 U34.1
PE3: U31.14 U34.2
PE4: U31.13 U34.3
PE5: U31.16 U34.4
PE6: U31.15 U34.5
PE7: C43.2 R66.1 U14.13 U34.53
PE8: U34.54
PE9: R115.1 U31.9 U34.55
PE10: U32.6 U34.56
PE11: R119.2 U32.1 U34.57
PE12: U32.5 U34.58
PE13: U32.2 U34.59
PE14: R120.2 U32.3 U34.60
PE15: R121.2 U32.7 U34.61
PF0: Q3.1 U34.19
PF1: Q2.1 U34.20
PF2: Q4.5 R50.2 U34.26
PF3: R77.2 U15.2 U34.10
PF4: Q4.2 R48.2 U34.11
PF6: R33.1 U16.1 U34.97
PF7: R34.1 U16.2 U34.15
PF14: R66.2 U34.51
PF15: R73.2 U14.16 U34.52
PG0: U4.7 U34.82
PG1: R13.2 U3.8 U34.83
PG2: U20.1 U34.84 X5.9
PG3: R8.1 TP10.1 U12.7 U13.7 U23.3 U34.85
PG4: R7.1 TP11.1 U12.8 U13.8 U23.4 U34.86
PG5: Q8.2 R94.2 U34.103
PG6: U1.7 U34.104
PG7: R2.1 U1.9 U34.105
PG8: R123.1 U34.106 U35.5
PG9: R125.1 U34.107 U36.3
PG10-NRST: C120.1 R122.2 U34.21
PIN#6_P01: D11.3 X6.6
PWR_SW: U3.2 X1.7
REF: C45.2 R64.1 R67.1 R68.2 U14.11
REGN: C3.2 R4.1 U1.22
ROW_1: U2.4 X1.1
ROW_2: U2.3 X1.2
ROW_3: U2.2 X1.3
RST: U9.1 U10.S2
SBU1: U26.11 U41.15
SBU2: U26.10 U41.14
SPO2_GPIO: C42.2 R63.1 U13.3 X4.5
SPO2_SCL: U13.2 X4.2
SPO2_SDA: U13.1 X4.3
STAT: D1.1 U1.4
STBY/R\E\S\E\T\: C44.2 R65.1 U14.14
SUSP: U37.12
TS: P19.1 R3.2 R4.2 U1.11
UART0.CTS: U37.23
UART0.DTR: Q6.2 R52.1 U37.28
UART0.RTS: Q5.2 R53.1 U37.24
USB4.D_N: R84.2 R85.2 R86.1 U1.3
USB4.D_P: R82.2 R83.1 R84.1 U1.2
USIM_CLK: R41.2 U9.7
USIM_DATA: R40.2 U9.6
USIM_RST: R42.2 U9.8
USIM_VDD: C15.1 C16.1 R39.2 U6.43 U9.5 U10.S1
VBAT: C5.2 D2.1 P18.1 Q8.4 R91.2 TP17.1 U1.13 U1.14
VBUS: C1.2 C14.1 C62.1 D6.1 P10.A4 P10.A9 P10.B4 P10.B9 R38.1 R89.1 R128.2 TP18.1 U1.1 U1.24 U7.5
VDD_PA: C98.2 C126.2 C127.1 C128.1 R126.2 U31.2 U36.5 U36.6 U36.7
VFAN: C9.1 C10.1 C11.1 C78.2 C79.2 C80.2 C88.2 C89.1 D7.1 P16.2 R31.2 R90.1 R106.2 TP12.1 U28.20 U28.21
VSYS: C6.2 C7.2 C8.2 C47.1 C48.1 C49.1 C50.1 C73.2 C74.2 C124.1 C125.1 C140.1 C141.1 FB1.2 FB4.1 FB6.1 L1.2 L2.1 L3.3 R1.2 R28.1 R111.2 TP16.1 U1.15 U1.16 U14.6 U15.3 U24.2 U36.1 U36.2 U40.1 U40.2
pads on no net: ESP32_MOD.4 ESP32_MOD.7 ESP32_MOD.9 ESP32_MOD.10 ESP32_MOD.15 ESP32_MOD.17 ESP32_MOD.24 ESP32_MOD.25 ESP32_MOD.28 ESP32_MOD.29 ESP32_MOD.32 ESP32_MOD.33 ESP32_MOD.34 ESP32_MOD.35 FID1. FID2. FID3. P10.A2 P10.A3 P10.A10 P10.A11 P10.B2 P10.B3 P10.B10 P10.B11 U1.8 U6.2 U6.4 U6.5 U6.6 U6.7 U6.11 U6.12 U6.13 U6.14 U6.16 U6.24 U6.25 U6.26 U6.40 U6.41 U6.42 U6.51 U6.56 U6.57 U6.63 U6.64 U6.65 U6.66 U6.76 U6.77 U6.78 U6.83 U6.84 U6.85 U6.86 U6.87 U6.88 U6.92 U6.93 U6.94 U6.95 U6.97 U6.98 U6.99 U8.4 U9.4 U10.11 U10.12 U10.S5 U11.4 U12.4 U13.4 U20.2 U21.4 U22.4 U26.13 U31.3 U31.6 U33.1 U36.4 U37.1 U37.2 U37.10 U37.13 U37.14 U37.15 U37.16 U37.17 U37.18 U37.19 U37.20 U37.21 U37.22 U37.27 U39. U40.4 X4. X6.0 X6.K1 X6.K2 X7.0 X7.K1 X7.K2

## Polygon pours and split planes (outlines as drawn)
GND on 3-GND "GND_L03_P123" (solid, pour order 123): 0,2110.24 3417.32,2110.24 3417.32,212.6 2578.74,212.6 2578.74,0 0,0
GND on 5-Sig "GND_L05_P133" (solid, pour order 133): 0,2110.24 3417.32,2110.24 3417.32,212.6 2578.74,212.6 2578.74,0 0,0
GND on 4-Sig/Pwr "GND_L04_P135" (solid, pour order 135): 0,2110.24 3417.32,2110.24 3417.32,212.6 2578.74,212.6 2578.74,0 0,0
GND on 1-Sig/GND "GND_L01_P112" (solid, pour order 112): 0,2110.24 3417.32,2110.24 3417.32,212.6 2578.74,212.6 2578.74,0 0,0
GND on 2-Sig "GND_L02_P118" (solid, pour order 118): 0,2110.24 3417.32,2110.24 3417.32,212.6 2578.74,212.6 2578.74,0 0,0
GND on 6-Sig/GND "GND_L06_P131" (solid, pour order 131): 0,2110.24 3417.32,2110.24 3417.32,212.6 2578.74,212.6 2578.74,0 0,0

## Keep-outs
Keep-Out Layer:
  text "'.Layer_Name'" at 4724.41,492.13 h98.43

## Other copper
1-Sig/GND:
  text "'.Layer_Name'" at 4724.41,2657.48 h98.43
2-Sig:
  text "'.Layer_Name'" at 4724.41,2362.2 h98.43
3-GND:
  text "'.Layer_Name'" at 4724.41,2263.78 h98.43
6-Sig/GND:
  text "'.Layer_Name'" at 5196.85,2165.35 h98.43

## Silkscreen, mask and mechanical layers (free items; w line width, h text height)
Top Overlay:
  text "'.Layer_Name'" at 4724.41,1181.1 h98.43
Bottom Overlay:
  text "'.Layer_Name'" at 5314.96,1082.68 h98.43
Top Paste:
  text "'.Layer_Name'" at 4724.41,984.25 h98.43
Bottom Paste:
  text "'.Layer_Name'" at 5314.96,885.83 h98.43
Top Solder:
  text "'.Layer_Name'" at 4724.41,787.4 h98.43
Bottom Solder:
  text "'.Layer_Name'" at 5314.96,688.98 h98.43
Drill Guide:
  text "'.Layer_Name'" at 4724.41,590.55 h98.43
Dimensions:
  text "'.Layer_Name'" at 4724.41,2066.93 h98.43
Fiducials:
  text "'.Layer_Name'" at 4724.41,1968.5 h98.43
Outline:
  the board outline again, w7.87
  text "'.Layer_Name'" at 4724.41,1870.08 h98.43
3D Body TOP:
  text "'.Layer_Name'" at 4724.41,1771.65 h98.43
TOP ASSY:
  text "'.Layer_Name'" at 4724.41,1673.23 h98.43
Courtyard TOP:
  lines w3.94: 1988.19,39.37 1988.19,90.55 ; 1988.19,2019.69 1988.19,2066.93
  text "'.Layer_Name'" at 4724.41,1574.8 h98.43
PCB Sheet:
  lines w27.56: -1412.6,-8000 -1412.6,3692.91 ; -1412.6,-5076.77 -1215.75,-5076.77 ; -1412.6,-2153.54 -1215.75,-2153.54 ; -1412.6,769.69 -1215.75,769.69 ; -1215.75,-6595 1367.2,-6595 2867.2,-6595 5870.87,-6595 ; -1215.75,3496.06 5870.87,3496.06 5870.87,-7803.15 -1215.75,-7803.15 -1215.75,3496.06 ; 284.53,-7803.15 284.53,-6595 ; 284.53,-7495 5870.87,-7495 ; 284.53,-7195 5870.87,-7195 ; 284.53,-6895 5870.87,-6895 ; 1149.21,-8000 1149.21,-7803.15 ; 1149.21,3496.06 1149.21,3692.91 ; 2467.2,-7803.15 2467.2,-7195 2467.2,-6595 ; 3508.66,-8000 3508.66,-7803.15 ; 3508.66,3496.06 3508.66,3692.91 ; 4567.2,-7803.15 4567.2,-7195 ; 5870.87,-5076.77 6067.72,-5076.77 ; 5870.87,-2153.54 6067.72,-2153.54 ; 5870.87,769.69 6067.72,769.69 ; -2200,-8000 -2200,3692.91 6067.72,3692.91 6067.72,-8000 -2200,-8000
  text "1" at -34.65,3555.12 h70
  text "2" at 2327.56,3555.12 h70
  text "3" at 4689.76,3555.12 h70
  text "A" at -1333.86,2132.87 h70
  text "A" at 5949.61,2132.87 h70
  text "'.Layer_Name'" at 4724.41,1476.38 h98.43
  text "B" at -1333.86,-790.35 h70
  text "B" at 5949.61,-790.35 h70
  text "C" at -1333.86,-3713.58 h70
  text "C" at 5949.61,-3713.58 h70
  text "D" at -1333.86,-6558.07 h70
  text "D" at 5949.61,-6558.07 h70
  text "ENGINEER:" at 334.53,-6695 h45
  text "PROJECT NAME:" at 2517.2,-6695 h45
  text "'.ProjectName'" at 3059.45,-6818.9 h118.11
  text "'._HWEngineer'" at 429.49,-6828.53 h60
  text "ACME CPU" at -1018.9,-6858.27 h196.85
  text "PCB DESIGNER:" at 334.53,-6990 h45
  text "BOARD NAME:" at 2517.2,-6990.28 h45
  text "'._CompanyName'" at -1018.9,-7055.12 h70
  text "'._BoardName'" at 3059.45,-7124.02 h118.11
  text "'._HWEngineer'" at 424.49,-7133.53 h60
  text "'._address1'" at -1018.9,-7251.97 h70
  text "DATE:" at 334.53,-7295 h45
  text "PART NO.:" at 2517.2,-7295 h45
  text "Ver:" at 4617.2,-7295 h45
  text "'._address2'" at -1018.9,-7350.39 h70
  text "'._Revision'" at 4975,-7400 h118.11
  text "'._DocumentDate'" at 424.49,-7403.53 h70
  text "'._PCBModel'" at 3059.45,-7429.13 h118.11
  text "'._address3'" at -1018.9,-7448.82 h50
  text "'._address4'" at -1018.9,-7547.24 h50
  text "FILE NAME:" at 334.53,-7595 h45
  text "SCH. NO.:" at 2517.2,-7595 h45
  text "SCALE:" at 4617.2,-7595 h45
  text "A4 M1:1" at 5000,-7700 h118.11
  text "'.ProjectNumber'" at 3059.45,-7724.41 h118.11
  text "'.Pcb_File_Name_No_Path'" at 427.01,-7729.87 h70
  text "1" at -34.65,-7940.94 h70
  text "2" at 2327.56,-7940.94 h70
  text "3" at 4689.76,-7940.94 h70
Drill Drawing:
  text "'.Layer_Name'" at 4724.41,393.7 h98.43
  text ".Legend" at -1181.1,-6299.21 h137.8
Courtyard BOT:
  text "'.Layer_Name'" at 5314.96,1377.95 h98.43
BOT ASSY:
  text "'.Layer_Name'" at 5314.96,1279.53 h98.43
Layer Stack:
  drawing of 871 lines, arcs and shapes, not listed
  text "'.Layer_Name'" at 4724.41,295.28 h98.43
  text "Layer" at -546.67,-704.83 h60
  text "Name" at -136.76,-704.83 h60
  text "Material" at 1312.82,-704.83 h60
  text "Thickness" at 2262.55,-704.83 h60
  text "Constant" at 2912.39,-704.83 h60
  text "Rigid Stack 1" at 3482.25,-704.83 h60
  text "Flex" at 4332.02,-704.83 h60
  text "1" at -546.67,-824.83 h60
  text "flexible Soldermask Top" at -136.76,-824.83 h60
  text "WE-SMFlex-0002" at 1312.82,-824.83 h60
  text "0.040mm" at 2262.55,-824.83 h60
  text "4.3" at 2912.39,-824.83 h60
  text "2" at -546.67,-944.83 h60
  text "Top Overlay" at -136.76,-944.83 h60
  text "3" at -546.67,-1064.83 h60
  text "Top Solder" at -136.76,-1064.83 h60
  text "WE-SM-0001" at 1312.82,-1064.83 h60
  text "0.015mm" at 2262.55,-1064.83 h60
  text "3.5" at 2912.39,-1064.83 h60
  text "4" at -546.67,-1184.83 h60
  text "1-Sig/GND" at -136.76,-1184.83 h60
  text "Copper" at 1312.82,-1184.83 h60
  text "0.045mm" at 2262.55,-1184.83 h60
  text "5" at -546.67,-1304.83 h60
  text "Polyimide" at -136.76,-1304.83 h60
  text "WE-PI-0103" at 1312.82,-1304.83 h60
  text "0.050mm" at 2262.55,-1304.83 h60
  text "3.4" at 2912.39,-1304.83 h60
  text "6" at -546.67,-1424.83 h60
  text "2-Sig" at -136.76,-1424.83 h60
  text "Copper" at 1312.82,-1424.83 h60
  text "0.017mm" at 2262.55,-1424.83 h60
  text "7" at -546.67,-1544.83 h60
  text "Dielectric 1" at -136.76,-1544.83 h60
  text "WE-PP-0033" at 1312.82,-1544.83 h60
  text "0.100mm" at 2262.55,-1544.83 h60
  text "4.4" at 2912.39,-1544.83 h60
  text "8" at -546.67,-1664.83 h60
  text "Core 1" at -136.76,-1664.83 h60
  text "WE-CO-0045" at 1312.82,-1664.83 h60
  text "0.250mm" at 2262.55,-1664.83 h60
  text "4.3" at 2912.39,-1664.83 h60
  text "9" at -546.67,-1784.83 h60
  text "3-GND" at -136.76,-1784.83 h60
  text "Copper" at 1312.82,-1784.83 h60
  text "0.017mm" at 2262.55,-1784.83 h60
  text "10" at -546.67,-1904.83 h60
  text "Dielectric 2" at -136.76,-1904.83 h60
  text "WE-PP-0035" at 1312.82,-1904.83 h60
  text "0.125mm" at 2262.55,-1904.83 h60
  text "3.7" at 2912.39,-1904.83 h60
  text "11" at -546.67,-2024.83 h60
  text "4-Sig/Pwr" at -136.76,-2024.83 h60
  text "Copper" at 1312.82,-2024.83 h60
  text "0.017mm" at 2262.55,-2024.83 h60
  text "12" at -546.67,-2144.83 h60
  text "Core 2" at -136.76,-2144.83 h60
  text "WE-CO-0045" at 1312.82,-2144.83 h60
  text "0.250mm" at 2262.55,-2144.83 h60
  text "4.3" at 2912.39,-2144.83 h60
  text "13" at -546.67,-2264.83 h60
  text "5-Sig" at -136.76,-2264.83 h60
  text "Copper" at 1312.82,-2264.83 h60
  text "0.017mm" at 2262.55,-2264.83 h60
  text "14" at -546.67,-2384.83 h60
  text "Dielectric 3" at -136.76,-2384.83 h60
  text "WE-PP-0034" at 1312.82,-2384.83 h60
  text "0.065mm" at 2262.55,-2384.83 h60
  text "3.5" at 2912.39,-2384.83 h60
  text "15" at -546.67,-2504.83 h60
  text "6-Sig/GND" at -136.76,-2504.83 h60
  text "Copper" at 1312.82,-2504.83 h60
  text "0.045mm" at 2262.55,-2504.83 h60
  text "16" at -546.67,-2624.83 h60
  text "Coverlay Bottom" at -136.76,-2624.83 h60
  text "WE-CL-0007" at 1312.82,-2624.83 h60
  text "0.040mm" at 2262.55,-2624.83 h60
  text "3.6" at 2912.39,-2624.83 h60
  text "17" at -546.67,-2744.83 h60
  text "Bottom Solder" at -136.76,-2744.83 h60
  text "WE-SM-0001" at 1312.82,-2744.83 h60
  text "0.015mm" at 2262.55,-2744.83 h60
  text "3.5" at 2912.39,-2744.83 h60
  text "18" at -546.67,-2864.83 h60
  text "Bottom Overlay" at -136.76,-2864.83 h60

## Dimensions
39.37,2070.87 to -85,2182.68 on Dimensions

## Text inside footprints (layer, text, board x,y; h text height)
C9: BOT ASSY "+" at 285,1170 h40 r180; Bottom Overlay "+" at 320,1060 h40 r180
C10: BOT ASSY "+" at 515,1130 h40; Bottom Overlay "+" at 500,1265 h40
C11: BOT ASSY "+" at 285,805 h40 r180; Bottom Overlay "+" at 320,695 h40 r180
C25: BOT ASSY "+" at 840,1500 h40; Bottom Overlay "+" at 755,1485 h40 r90
C26: BOT ASSY "+" at 815,1305 h40; Bottom Overlay "+" at 760,1205 h40